# EAGLE board GrapherBlank4 (EAGLE 5.10), part 1 of 2
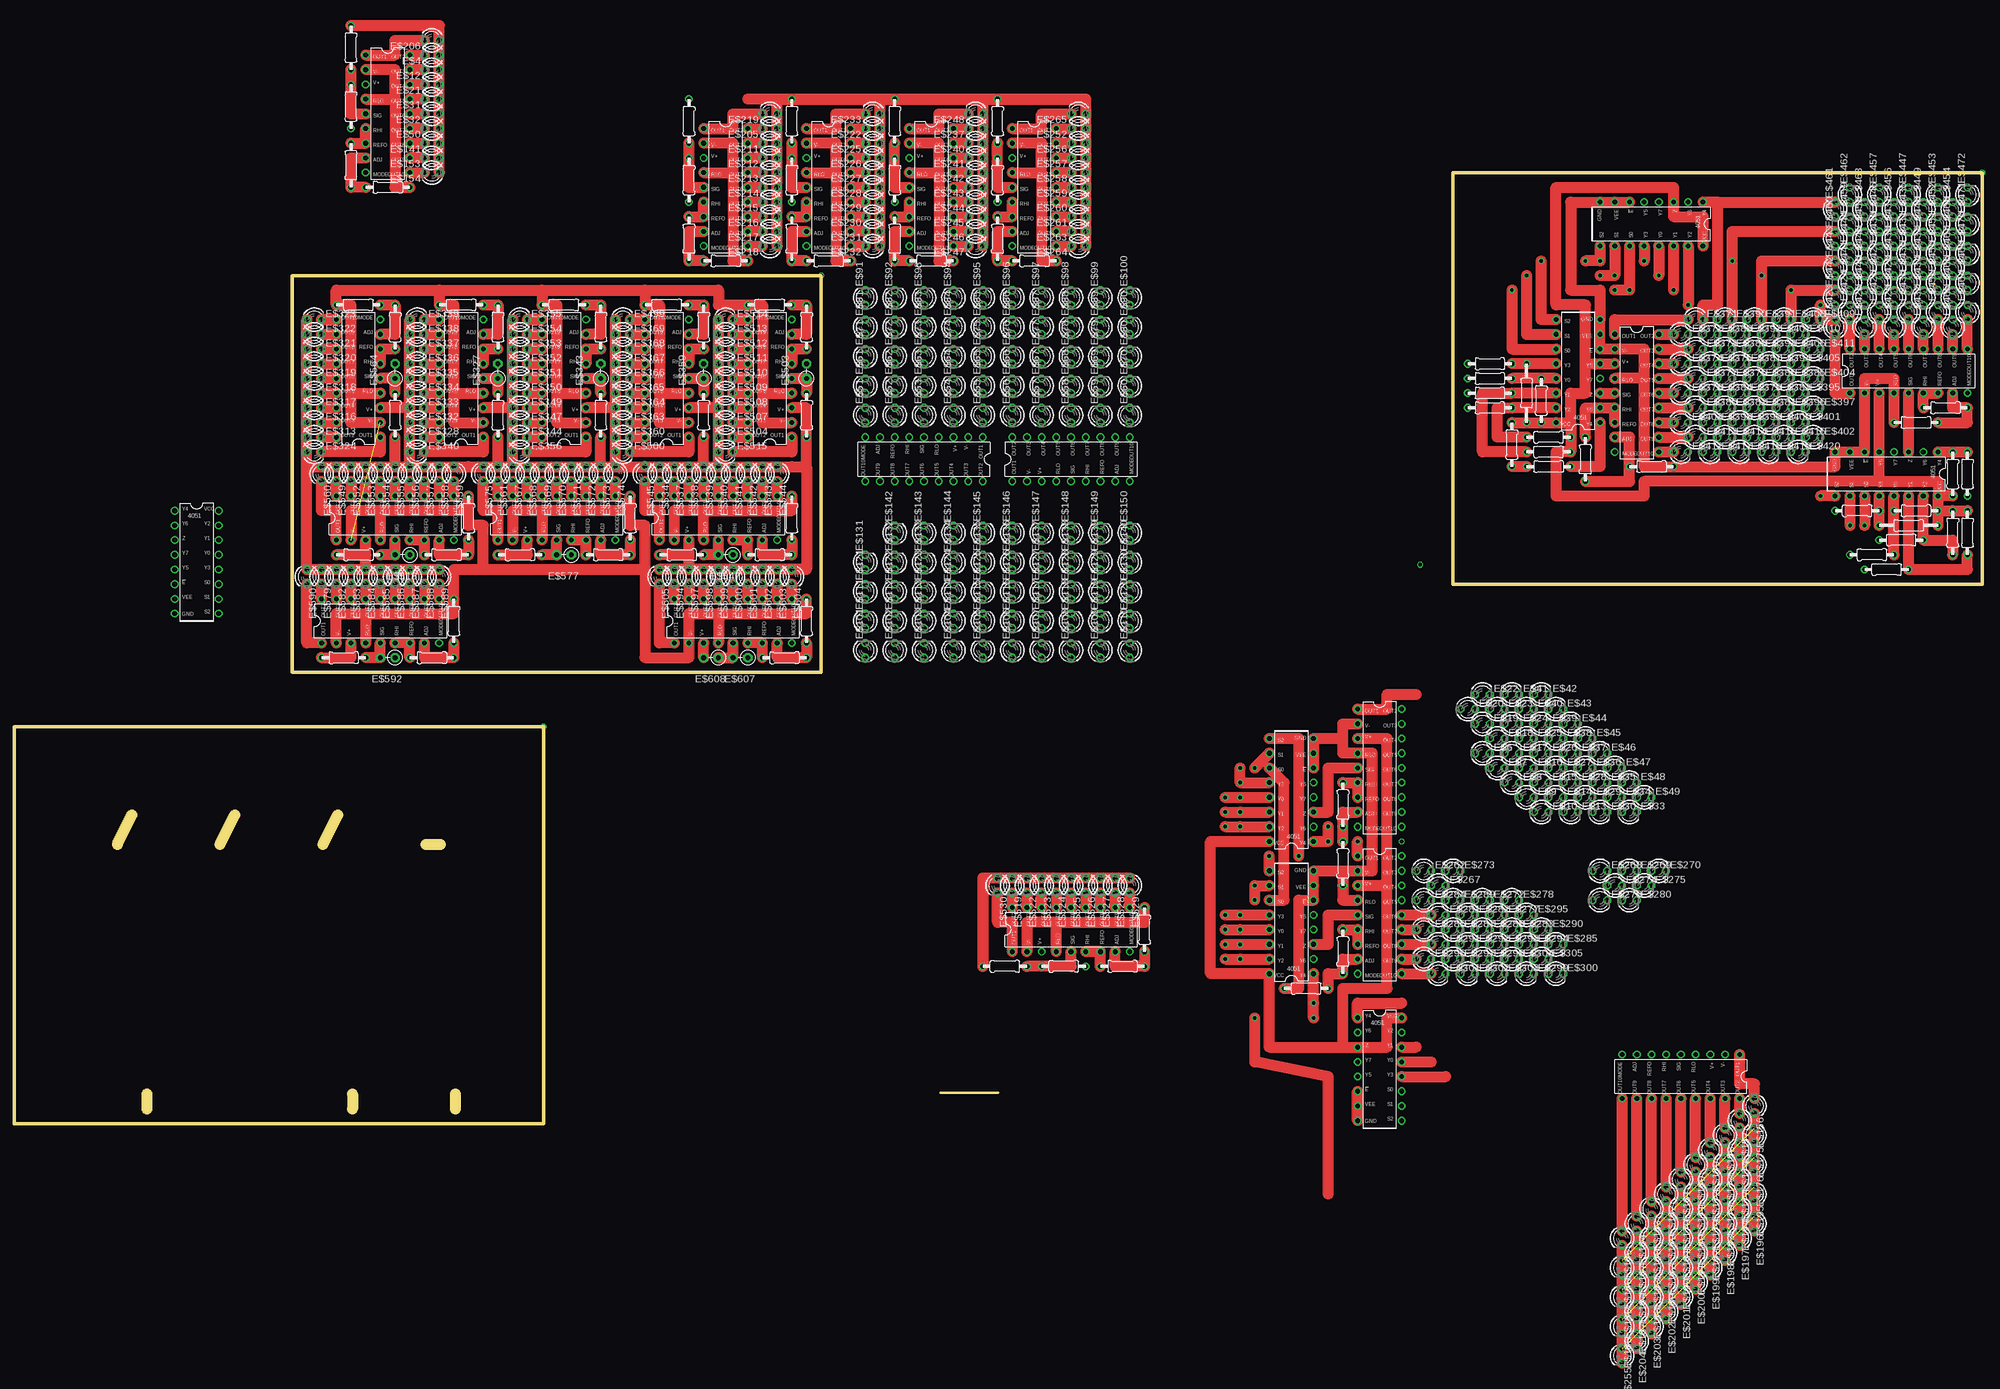
[diagram p0: board, top side]
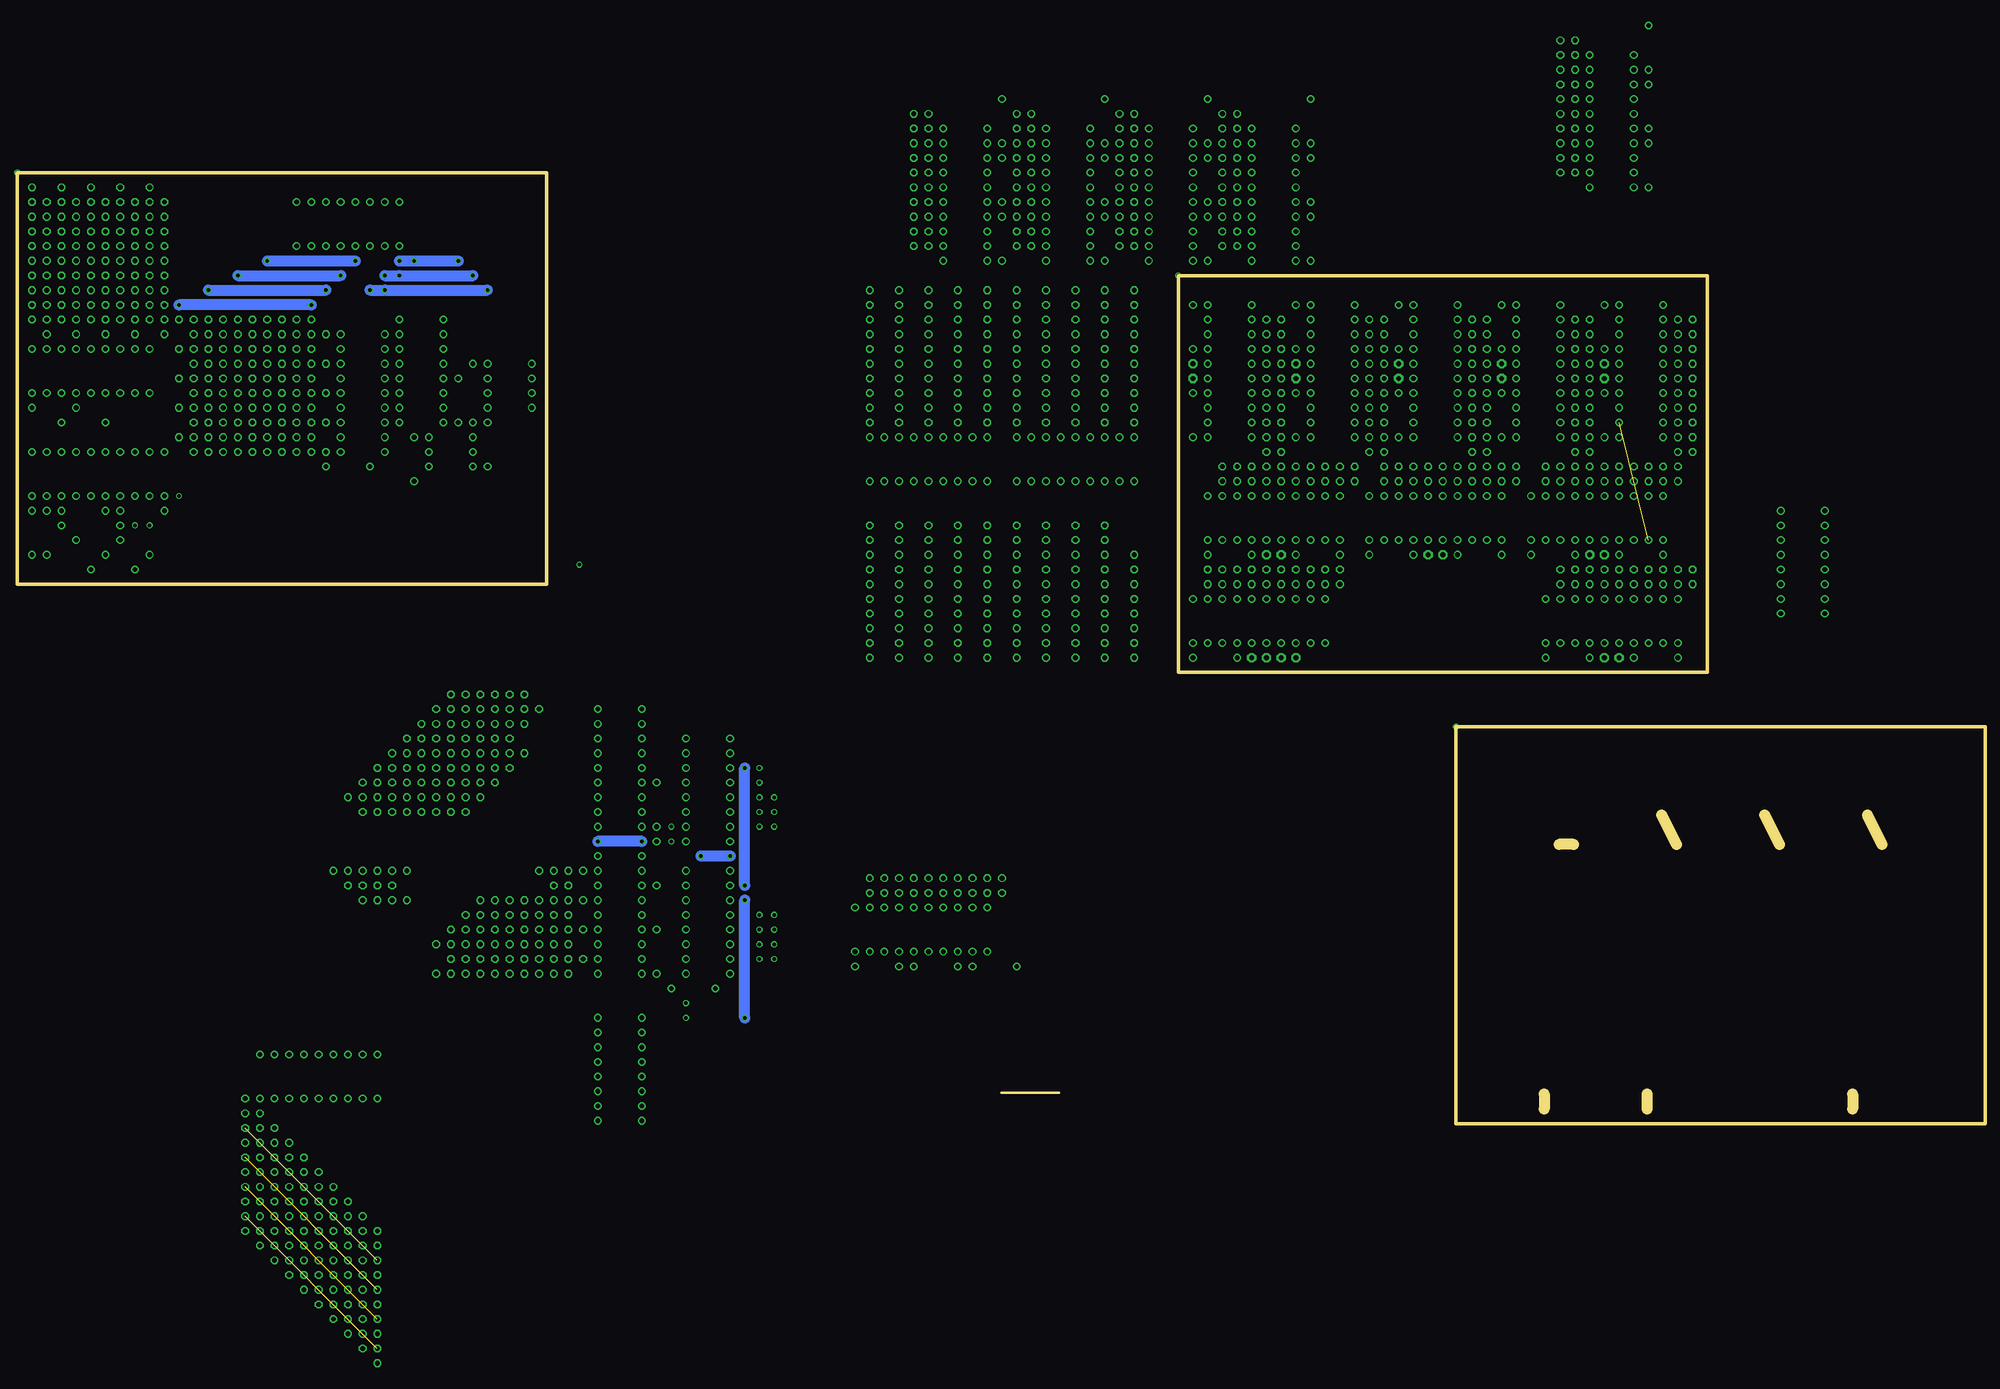
[diagram p1: board, bottom side, seen from below]

Size 340.11 x 164.34 mm. Coordinates in mm from the lower left corner, seen from the top.
Outline: 139.45,77.98 139.45,146.56 48.01,146.56 48.01,77.98 139.45,77.98
Outline: 340.11,93.22 340.11,164.34 248.67,164.34 248.67,93.22 340.11,93.22
Outline: 91.44,0 91.44,68.58 0,68.58 0,0 91.44,0
Copper layers (1*16): Top 0.035mm / dielectric 1.5mm / Bottom 0.035mm
Design rules "default": minimum track width 10mil, minimum drill 24mil, track to track 8mil, track to pad 8mil, pad to pad 8mil, via to via 8mil, smd to smd 8mil, copper to edge 40mil, drill to drill 8mil, minimum pad ring 10mil, minimum via ring 8mil, stop-mask expansion 4mil, vias tented up to drill 0mil, thermal gap 10mil
Milling: 8 lines

## Footprints (pad centres in the part's own frame; a part is rotated, then mirrored left to right if it is on the bottom)
LM3914-10LED-BARGRAPH = drill 0.813 round: 1!R -3.81,1.27; 1!S -3.81,3.81; 1Q 3.81,1.27; 2!R -3.81,-3.81; 2!S -3.81,-6.35; 2Q 3.81,-8.89; 2Q1 3.81,-11.43; 2Q3 -3.81,-11.43; 3!R 3.81,-1.27; 3!S 3.81,-3.81; 3Q 3.81,-6.35; 4!R 3.81,3.81; 4!S 3.81,6.35; 4Q -3.81,8.89; GND -3.81,-8.89; NC -3.81,6.35; OE -3.81,-1.27; VCC 3.81,8.89
RESISTOR = drill 0.813 round: IN1 -3.81,0; IN2 3.81,0
LED3MM = drill 0.813 octagon: A -1.27,0; K 1.27,0
4051-ANALOG-MUX = drill 0.813 round: CLOCK 3.81,-6.35; GND -3.81,-8.89; Q0 3.81,-8.89; Q1 -3.81,-6.35; Q2 -3.81,-3.81; Q3 -3.81,-1.27; Q4 -3.81,3.81; Q5 -3.81,6.35; Q6 -3.81,1.27; Q7 3.81,1.27; Q8 3.81,-1.27; Q9 3.81,3.81; Q10 3.81,6.35; Q11 -3.81,8.89; RESET 3.81,-3.81; VCC 3.81,8.89
RS-2,5 = drill 0.813 pad 1.6 octagon: 1 -1.27,0; 2 1.27,0
RESISTOR-L2 = drill 0.813 round: IN1 -5.08,0; IN2 5.08,0

## Placement (x,y rotation side)
E$1  [LM3914-10LED-BARGRAPH]  235.97,62.74 0 top
E$2  [RESISTOR]  116.59,163.07 270 top
E$3  [RESISTOR]  122.94,149.1 180 top
E$4  [LED3MM]  72.14,184.66 180 top  (outside the outline)
E$5  [LM3914-10LED-BARGRAPH]  64.52,175.77 0 top
E$6  [LED3MM]  253.75,64.01 0 top
E$7  [LED3MM]  256.29,61.47 0 top
E$8  [LED3MM]  258.83,58.93 0 top
E$9  [LED3MM]  261.37,56.39 0 top
E$10  [LED3MM]  263.91,53.85 0 top
E$11  [RESISTOR]  58.17,165.61 90 top
E$12  [LED3MM]  72.14,182.12 180 top  (outside the outline)
E$13  [LED3MM]  268.99,53.85 0 top
E$14  [LED3MM]  266.45,56.39 0 top
E$15  [LED3MM]  263.91,58.93 0 top
E$16  [LED3MM]  261.37,61.47 0 top
E$17  [LED3MM]  258.83,64.01 0 top
E$18  [LED3MM]  256.29,66.55 0 top
E$19  [LED3MM]  253.75,69.09 0 top
E$20  [LED3MM]  251.21,71.63 0 top
E$21  [LED3MM]  72.14,179.58 180 top  (outside the outline)
E$22  [LED3MM]  253.75,74.17 0 top
E$23  [LED3MM]  256.29,71.63 0 top
E$24  [LED3MM]  258.83,69.09 0 top
E$25  [LED3MM]  261.37,66.55 0 top
E$26  [LED3MM]  263.91,64.01 0 top
E$27  [LED3MM]  266.45,61.47 0 top
E$28  [LED3MM]  268.99,58.93 0 top
E$29  [LED3MM]  271.53,56.39 0 top
E$30  [LED3MM]  274.07,53.85 0 top
E$31  [LED3MM]  72.14,177.04 180 top  (outside the outline)
E$32  [LED3MM]  72.14,174.5 180 top  (outside the outline)
E$33  [LED3MM]  279.15,53.85 0 top
E$34  [LED3MM]  276.61,56.39 0 top
E$35  [LED3MM]  274.07,58.93 0 top
E$36  [LED3MM]  271.53,61.47 0 top
E$37  [LED3MM]  268.99,64.01 0 top
E$38  [LED3MM]  266.45,66.55 0 top
E$39  [LED3MM]  263.91,69.09 0 top
E$40  [LED3MM]  261.37,71.63 0 top
E$41  [LED3MM]  258.83,74.17 0 top
E$42  [LED3MM]  263.91,74.17 0 top
E$43  [LED3MM]  266.45,71.63 0 top
E$44  [LED3MM]  268.99,69.09 0 top
E$45  [LED3MM]  271.53,66.55 0 top
E$46  [LED3MM]  274.07,64.01 0 top
E$47  [LED3MM]  276.61,61.47 0 top
E$48  [LED3MM]  279.15,58.93 0 top
E$49  [LED3MM]  281.69,56.39 0 top
E$50  [LED3MM]  72.14,171.96 180 top  (outside the outline)
E$51  [LED3MM]  147.07,122.43 90 top
E$52  [LED3MM]  152.15,122.43 90 top
E$53  [LED3MM]  157.23,122.43 90 top
E$54  [LED3MM]  162.31,122.43 90 top
E$55  [LED3MM]  167.39,122.43 90 top
E$56  [LED3MM]  172.47,122.43 90 top
E$57  [LED3MM]  177.55,122.43 90 top
E$58  [LED3MM]  182.63,122.43 90 top
E$59  [LED3MM]  187.71,122.43 90 top
E$60  [LED3MM]  192.79,122.43 90 top
E$61  [LED3MM]  147.07,127.51 90 top
E$62  [LED3MM]  152.15,127.51 90 top
E$63  [LED3MM]  157.23,127.51 90 top
E$64  [LED3MM]  162.31,127.51 90 top
E$65  [LED3MM]  167.39,127.51 90 top
E$66  [LED3MM]  172.47,127.51 90 top
E$67  [LED3MM]  177.55,127.51 90 top
E$68  [LED3MM]  182.63,127.51 90 top
E$69  [LED3MM]  187.71,127.51 90 top
E$70  [LED3MM]  192.79,127.51 90 top
E$71  [LED3MM]  147.07,132.59 90 top
E$72  [LED3MM]  152.15,132.59 90 top
E$73  [LED3MM]  157.23,132.59 90 top
E$74  [LED3MM]  162.31,132.59 90 top
E$75  [LED3MM]  167.39,132.59 90 top
E$76  [LED3MM]  172.47,132.59 90 top
E$77  [LED3MM]  177.55,132.59 90 top
E$78  [LED3MM]  182.63,132.59 90 top
E$79  [LED3MM]  187.71,132.59 90 top
E$80  [LED3MM]  192.79,132.59 90 top
E$81  [LED3MM]  147.07,137.67 90 top
E$82  [LED3MM]  152.15,137.67 90 top
E$83  [LED3MM]  157.23,137.67 90 top
E$84  [LED3MM]  162.31,137.67 90 top
E$85  [LED3MM]  167.39,137.67 90 top
E$86  [LED3MM]  172.47,137.67 90 top
E$87  [LED3MM]  177.55,137.67 90 top
E$88  [LED3MM]  182.63,137.67 90 top
E$89  [LED3MM]  187.71,137.67 90 top
E$90  [LED3MM]  192.79,137.67 90 top
E$91  [LED3MM]  147.07,142.75 90 top
E$92  [LED3MM]  152.15,142.75 90 top
E$93  [LED3MM]  157.23,142.75 90 top
E$94  [LED3MM]  162.31,142.75 90 top
E$95  [LED3MM]  167.39,142.75 90 top
E$96  [LED3MM]  172.47,142.75 90 top
E$97  [LED3MM]  177.55,142.75 90 top
E$98  [LED3MM]  182.63,142.75 90 top
E$99  [LED3MM]  187.71,142.75 90 top
E$100  [LED3MM]  192.79,142.75 90 top
E$101  [LED3MM]  147.07,81.79 90 top
E$102  [LED3MM]  152.15,81.79 90 top
E$103  [LED3MM]  157.23,81.79 90 top
E$104  [LED3MM]  162.31,81.79 90 top
E$105  [LED3MM]  167.39,81.79 90 top
E$106  [LED3MM]  172.47,81.79 90 top
E$107  [LED3MM]  177.55,81.79 90 top
E$108  [LED3MM]  182.63,81.79 90 top
E$109  [LED3MM]  187.71,81.79 90 top
E$110  [LED3MM]  192.79,81.79 90 top
E$111  [LED3MM]  147.07,86.87 90 top
E$112  [LED3MM]  152.15,86.87 90 top
E$113  [LED3MM]  157.23,86.87 90 top
E$114  [LED3MM]  162.31,86.87 90 top
E$115  [LED3MM]  167.39,86.87 90 top
E$116  [LED3MM]  172.47,86.87 90 top
E$117  [LED3MM]  177.55,86.87 90 top
E$118  [LED3MM]  182.63,86.87 90 top
E$119  [LED3MM]  187.71,86.87 90 top
E$120  [LED3MM]  192.79,86.87 90 top
E$121  [LED3MM]  147.07,91.95 90 top
E$122  [LED3MM]  152.15,91.95 90 top
E$123  [LED3MM]  157.23,91.95 90 top
E$124  [LED3MM]  162.31,91.95 90 top
E$125  [LED3MM]  167.39,91.95 90 top
E$126  [LED3MM]  172.47,91.95 90 top
E$127  [LED3MM]  177.55,91.95 90 top
E$128  [LED3MM]  182.63,91.95 90 top
E$129  [LED3MM]  187.71,91.95 90 top
E$130  [LED3MM]  192.79,91.95 90 top
E$131  [LED3MM]  147.07,97.03 90 top
E$132  [LED3MM]  152.15,97.03 90 top
E$133  [LED3MM]  157.23,97.03 90 top
E$134  [LED3MM]  162.31,97.03 90 top
E$135  [LED3MM]  167.39,97.03 90 top
E$136  [LED3MM]  172.47,97.03 90 top
E$137  [LED3MM]  177.55,97.03 90 top
E$138  [LED3MM]  182.63,97.03 90 top
E$139  [LED3MM]  187.71,97.03 90 top
E$140  [LED3MM]  192.79,97.03 90 top
E$141  [LED3MM]  72.14,169.42 180 top  (outside the outline)
E$142  [LED3MM]  152.15,102.11 90 top
E$143  [LED3MM]  157.23,102.11 90 top
E$144  [LED3MM]  162.31,102.11 90 top
E$145  [LED3MM]  167.39,102.11 90 top
E$146  [LED3MM]  172.47,102.11 90 top
E$147  [LED3MM]  177.55,102.11 90 top
E$148  [LED3MM]  182.63,102.11 90 top
E$149  [LED3MM]  187.71,102.11 90 top
E$150  [LED3MM]  192.79,102.11 90 top
E$151  [LM3914-10LED-BARGRAPH]  181.36,114.81 90 top
E$152  [LM3914-10LED-BARGRAPH]  158.5,114.81 270 top
E$153  [LED3MM]  72.14,166.88 180 top
E$154  [LED3MM]  72.14,164.34 180 top
E$155  [LM3914-10LED-BARGRAPH]  289.31,8.13 270 top
E$156  [LED3MM]  300.74,3.05 270 top
E$157  [LED3MM]  298.2,0.51 270 top
E$158  [LED3MM]  295.66,-2.03 270 top
E$159  [LED3MM]  293.12,-4.57 270 top  (outside the outline)
E$160  [LED3MM]  290.58,-7.11 270 top  (outside the outline)
E$161  [LED3MM]  288.04,-9.65 270 top  (outside the outline)
E$162  [LED3MM]  285.5,-12.19 270 top  (outside the outline)
E$163  [LED3MM]  282.96,-14.73 270 top  (outside the outline)
E$164  [LED3MM]  280.42,-17.27 270 top  (outside the outline)
E$165  [LED3MM]  277.88,-19.81 270 top  (outside the outline)
E$166  [LED3MM]  277.88,-24.89 270 top  (outside the outline)
E$167  [LED3MM]  280.42,-22.35 270 top  (outside the outline)
E$168  [LED3MM]  282.96,-19.81 270 top  (outside the outline)
E$169  [LED3MM]  285.5,-17.27 270 top  (outside the outline)
E$170  [LED3MM]  288.04,-14.73 270 top  (outside the outline)
E$171  [LED3MM]  290.58,-12.19 270 top  (outside the outline)
E$172  [LED3MM]  293.12,-9.65 270 top  (outside the outline)
E$173  [LED3MM]  295.66,-7.11 270 top  (outside the outline)
E$174  [LED3MM]  298.2,-4.57 270 top  (outside the outline)
E$175  [LED3MM]  300.74,-2.03 270 top
E$176  [LED3MM]  300.74,-7.11 270 top  (outside the outline)
E$177  [LED3MM]  298.2,-9.65 270 top  (outside the outline)
E$178  [LED3MM]  295.66,-12.19 270 top  (outside the outline)
E$179  [LED3MM]  293.12,-14.73 270 top  (outside the outline)
E$180  [LED3MM]  290.58,-17.27 270 top  (outside the outline)
E$181  [LED3MM]  288.04,-19.81 270 top  (outside the outline)
E$182  [LED3MM]  285.5,-22.35 270 top  (outside the outline)
E$183  [LED3MM]  282.96,-24.89 270 top  (outside the outline)
E$184  [LED3MM]  280.42,-27.43 270 top  (outside the outline)
E$185  [LED3MM]  277.88,-29.97 270 top  (outside the outline)
E$186  [LED3MM]  277.88,-35.05 270 top  (outside the outline)
E$187  [LED3MM]  280.42,-32.51 270 top  (outside the outline)
E$188  [LED3MM]  282.96,-29.97 270 top  (outside the outline)
E$189  [LED3MM]  285.5,-27.43 270 top  (outside the outline)
E$190  [LED3MM]  288.04,-24.89 270 top  (outside the outline)
E$191  [LED3MM]  290.58,-22.35 270 top  (outside the outline)
E$192  [LED3MM]  293.12,-19.81 270 top  (outside the outline)
E$193  [LED3MM]  295.66,-17.27 270 top  (outside the outline)
E$194  [LED3MM]  298.2,-14.73 270 top  (outside the outline)
E$195  [LED3MM]  300.74,-12.19 270 top  (outside the outline)
E$196  [LED3MM]  300.74,-17.27 270 top  (outside the outline)
E$197  [LED3MM]  298.2,-19.81 270 top  (outside the outline)
E$198  [LED3MM]  295.66,-22.35 270 top  (outside the outline)
E$199  [LED3MM]  293.12,-24.89 270 top  (outside the outline)
E$200  [LED3MM]  290.58,-27.43 270 top  (outside the outline)
E$201  [LED3MM]  288.04,-29.97 270 top  (outside the outline)
E$202  [LED3MM]  285.5,-32.51 270 top  (outside the outline)
E$203  [LED3MM]  282.96,-35.05 270 top  (outside the outline)
E$204  [LED3MM]  280.42,-37.59 270 top  (outside the outline)
E$205  [LED3MM]  130.56,171.96 180 top  (outside the outline)
E$206  [LED3MM]  72.14,187.2 180 top  (outside the outline)
E$207  [LM3914-10LED-BARGRAPH]  122.94,163.07 0 top
E$208  [RESISTOR]  116.59,152.91 90 top
E$209  [RESISTOR]  58.17,185.93 270 top  (outside the outline)
E$210  [RESISTOR]  116.59,173.23 270 top  (outside the outline)
E$211  [LED3MM]  130.56,169.42 180 top  (outside the outline)
E$212  [LED3MM]  130.56,166.88 180 top
E$213  [LED3MM]  130.56,164.34 180 top
E$214  [LED3MM]  130.56,161.8 180 top
E$215  [LED3MM]  130.56,159.26 180 top
E$216  [LED3MM]  130.56,156.72 180 top
E$217  [LED3MM]  130.56,154.18 180 top
E$218  [LED3MM]  130.56,151.64 180 top
E$219  [LED3MM]  130.56,174.5 180 top  (outside the outline)
E$220  [RESISTOR]  64.52,161.8 180 top
E$221  [RESISTOR]  58.17,175.77 270 top  (outside the outline)
E$222  [LED3MM]  148.34,171.96 180 top  (outside the outline)
E$223  [LM3914-10LED-BARGRAPH]  140.72,163.07 0 top
E$224  [RESISTOR]  134.37,152.91 90 top
E$225  [LED3MM]  148.34,169.42 180 top  (outside the outline)
E$226  [LED3MM]  148.34,166.88 180 top
E$227  [LED3MM]  148.34,164.34 180 top
E$228  [LED3MM]  148.34,161.8 180 top
E$229  [LED3MM]  148.34,159.26 180 top
E$230  [LED3MM]  148.34,156.72 180 top
E$231  [LED3MM]  148.34,154.18 180 top
E$232  [LED3MM]  148.34,151.64 180 top
E$233  [LED3MM]  148.34,174.5 180 top  (outside the outline)
E$234  [RESISTOR]  134.37,173.23 270 top  (outside the outline)
E$235  [RESISTOR]  140.72,149.1 180 top
E$236  [RESISTOR]  134.37,163.07 270 top
E$237  [LED3MM]  166.12,171.96 180 top  (outside the outline)
E$238  [LM3914-10LED-BARGRAPH]  158.5,163.07 0 top
E$239  [RESISTOR]  152.15,152.91 90 top
E$240  [LED3MM]  166.12,169.42 180 top  (outside the outline)
E$241  [LED3MM]  166.12,166.88 180 top
E$242  [LED3MM]  166.12,164.34 180 top
E$243  [LED3MM]  166.12,161.8 180 top
E$244  [LED3MM]  166.12,159.26 180 top
E$245  [LED3MM]  166.12,156.72 180 top
E$246  [LED3MM]  166.12,154.18 180 top
E$247  [LED3MM]  166.12,151.64 180 top
E$248  [LED3MM]  166.12,174.5 180 top  (outside the outline)
E$249  [RESISTOR]  152.15,173.23 270 top  (outside the outline)
E$250  [RESISTOR]  158.5,149.1 180 top
E$251  [RESISTOR]  152.15,163.07 270 top
E$252  [LED3MM]  183.9,171.96 180 top  (outside the outline)
E$253  [LM3914-10LED-BARGRAPH]  176.28,163.07 0 top
E$254  [RESISTOR]  169.93,152.91 90 top
E$255  [LED3MM]  277.88,-40.13 270 top  (outside the outline)
E$256  [LED3MM]  183.9,169.42 180 top  (outside the outline)
E$257  [LED3MM]  183.9,166.88 180 top
E$258  [LED3MM]  183.9,164.34 180 top
E$259  [LED3MM]  183.9,161.8 180 top
E$260  [LED3MM]  183.9,159.26 180 top
E$261  [LED3MM]  183.9,156.72 180 top
E$262  [LED3MM]  243.59,43.69 0 top
E$263  [LED3MM]  183.9,154.18 180 top
E$264  [LED3MM]  183.9,151.64 180 top
E$265  [LED3MM]  183.9,174.5 180 top  (outside the outline)
E$266  [RESISTOR]  169.93,173.23 270 top  (outside the outline)
E$267  [LED3MM]  246.13,41.15 0 top
E$268  [LED3MM]  274.07,43.69 0 top
E$269  [LED3MM]  279.15,43.69 0 top
E$270  [LED3MM]  284.23,43.69 0 top
E$271  [RESISTOR]  176.28,149.1 180 top
E$272  [LED3MM]  253.75,38.61 0 top
E$273  [LED3MM]  248.67,43.69 0 top
E$274  [LED3MM]  276.61,41.15 0 top
E$275  [LED3MM]  281.69,41.15 0 top
E$276  [RESISTOR]  169.93,163.07 270 top
E$277  [LED3MM]  256.29,36.07 0 top
E$278  [LED3MM]  258.83,38.61 0 top
E$279  [LED3MM]  274.07,38.61 0 top
E$280  [LED3MM]  279.15,38.61 0 top
E$281  [LED3MM]  246.13,36.07 0 top
E$282  [LED3MM]  251.21,36.07 0 top
E$283  [LED3MM]  258.83,33.53 0 top
E$284  [LED3MM]  243.59,38.61 0 top
E$285  [LED3MM]  266.45,30.99 0 top
E$286  [LED3MM]  243.59,33.53 0 top
E$287  [LED3MM]  248.67,33.53 0 top
E$288  [LED3MM]  253.75,33.53 0 top
E$289  [LED3MM]  248.67,38.61 0 top
E$290  [LED3MM]  263.91,33.53 0 top
E$291  [LED3MM]  246.13,30.99 0 top
E$292  [LED3MM]  251.21,30.99 0 top
E$293  [LED3MM]  256.29,30.99 0 top
E$294  [LED3MM]  261.37,30.99 0 top
E$295  [LED3MM]  261.37,36.07 0 top
E$296  [LED3MM]  243.59,28.45 0 top
E$297  [LED3MM]  248.67,28.45 0 top
E$298  [LED3MM]  253.75,28.45 0 top
E$299  [LED3MM]  261.37,25.91 0 top
E$300  [LED3MM]  266.45,25.91 0 top
E$301  [LED3MM]  246.13,25.91 0 top
E$302  [LED3MM]  251.21,25.91 0 top
E$303  [LED3MM]  256.29,25.91 0 top
E$304  [LED3MM]  258.83,28.45 0 top
E$305  [LED3MM]  263.91,28.45 0 top
E$306  [LM3914-10LED-BARGRAPH]  235.97,37.34 0 top
E$307  [4051-ANALOG-MUX]  220.73,34.8 180 top
E$308  [RESISTOR]  229.62,29.72 90 top
E$309  [RESISTOR]  223.27,23.37 0 top
E$310  [RESISTOR]  229.62,55.12 90 top
E$311  [RESISTOR]  229.62,44.96 90 top
E$312  [4051-ANALOG-MUX]  220.73,57.66 180 top
E$313  [LED3MM]  51.82,118.62 0 top
E$314  [LM3914-10LED-BARGRAPH]  59.44,127.51 180 top
E$315  [RESISTOR]  65.79,137.67 270 top
E$316  [LED3MM]  51.82,121.16 0 top
E$317  [LED3MM]  51.82,123.7 0 top
E$318  [LED3MM]  51.82,126.24 0 top
E$319  [LED3MM]  51.82,128.78 0 top
E$320  [LED3MM]  51.82,131.32 0 top
E$321  [LED3MM]  51.82,133.86 0 top
E$322  [LED3MM]  51.82,136.4 0 top
E$323  [LED3MM]  51.82,138.94 0 top
E$324  [LED3MM]  51.82,116.08 0 top
E$325  [RESISTOR]  65.79,122.43 270 top
E$326  [RESISTOR]  59.44,141.48 0 top
E$327  [RS-2,5]  83.57,130.05 90 top
E$328  [LED3MM]  69.6,118.62 0 top
E$329  [4051-ANALOG-MUX]  235.97,9.4 0 top
E$330  [LM3914-10LED-BARGRAPH]  77.22,127.51 180 top
E$331  [RESISTOR]  83.57,137.67 270 top
E$332  [LED3MM]  69.6,121.16 0 top
E$333  [LED3MM]  69.6,123.7 0 top
E$334  [LED3MM]  69.6,126.24 0 top
E$335  [LED3MM]  69.6,128.78 0 top
E$336  [LED3MM]  69.6,131.32 0 top
E$337  [LED3MM]  69.6,133.86 0 top
E$338  [LED3MM]  69.6,136.4 0 top
E$339  [LED3MM]  69.6,138.94 0 top
E$340  [LED3MM]  69.6,116.08 0 top
E$341  [RESISTOR]  101.35,122.43 270 top
E$342  [RESISTOR]  77.22,141.48 0 top
E$343  [RS-2,5]  101.35,130.05 90 top
E$344  [LED3MM]  87.38,118.62 0 top
E$345  [LM3914-10LED-BARGRAPH]  95,127.51 180 top
E$346  [RESISTOR]  101.35,137.67 270 top
E$347  [LED3MM]  87.38,121.16 0 top
E$348  [4051-ANALOG-MUX]  31.5,97.03 0 top
E$349  [LED3MM]  87.38,123.7 0 top
E$350  [LED3MM]  87.38,126.24 0 top
E$351  [LED3MM]  87.38,128.78 0 top
E$352  [LED3MM]  87.38,131.32 0 top
E$353  [LED3MM]  87.38,133.86 0 top
E$354  [LED3MM]  87.38,136.4 0 top
E$355  [LED3MM]  87.38,138.94 0 top
E$356  [LED3MM]  87.38,116.08 0 top
E$357  [RESISTOR]  119.13,122.43 270 top
E$358  [RESISTOR]  95,141.48 0 top
E$359  [RS-2,5]  119.13,130.05 90 top
E$360  [LED3MM]  105.16,118.62 0 top
E$361  [LM3914-10LED-BARGRAPH]  112.78,127.51 180 top
E$362  [RESISTOR]  119.13,137.67 270 top
E$363  [LED3MM]  105.16,121.16 0 top
E$364  [LED3MM]  105.16,123.7 0 top
E$365  [LED3MM]  105.16,126.24 0 top
E$366  [LED3MM]  105.16,128.78 0 top
E$367  [LED3MM]  105.16,131.32 0 top
E$368  [LED3MM]  105.16,133.86 0 top
E$369  [LED3MM]  105.16,136.4 0 top
E$370  [LM3914-10LED-BARGRAPH]  280.42,127.51 0 top
E$371  [LED3MM]  290.58,138.94 0 top
E$372  [LED3MM]  288.04,136.4 0 top
E$373  [LED3MM]  290.58,133.86 0 top
E$374  [LED3MM]  288.04,131.32 0 top
E$375  [LED3MM]  293.12,131.32 0 top
E$376  [LED3MM]  295.66,128.78 0 top
E$377  [LED3MM]  290.58,128.78 0 top
E$378  [LED3MM]  288.04,126.24 0 top
E$379  [LED3MM]  298.2,126.24 0 top
E$380  [LED3MM]  290.58,123.7 0 top
E$381  [LED3MM]  300.74,123.7 0 top
E$382  [LED3MM]  295.66,123.7 0 top
E$383  [LED3MM]  303.28,126.24 0 top
E$384  [LED3MM]  293.12,126.24 0 top
E$385  [LED3MM]  305.82,128.78 0 top
E$386  [LED3MM]  300.74,128.78 0 top
E$387  [LED3MM]  298.2,131.32 0 top
E$388  [LED3MM]  295.66,133.86 0 top
E$389  [LED3MM]  293.12,136.4 0 top
E$390  [LED3MM]  295.66,138.94 0 top
E$391  [LED3MM]  300.74,138.94 0 top
E$392  [LED3MM]  298.2,136.4 0 top
E$393  [LED3MM]  300.74,133.86 0 top
E$394  [LED3MM]  303.28,131.32 0 top
E$395  [LED3MM]  308.36,126.24 0 top
E$396  [LED3MM]  305.82,123.7 0 top
E$397  [LED3MM]  310.9,123.7 0 top
E$398  [LED3MM]  293.12,121.16 0 top
E$399  [LED3MM]  298.2,121.16 0 top
E$400  [LED3MM]  303.28,121.16 0 top
E$401  [LED3MM]  308.36,121.16 0 top
E$402  [LED3MM]  310.9,118.62 0 top
E$403  [LED3MM]  288.04,121.16 0 top
E$404  [LED3MM]  310.9,128.78 0 top
E$405  [LED3MM]  308.36,131.32 0 top
E$406  [LED3MM]  305.82,133.86 0 top
E$407  [LED3MM]  303.28,136.4 0 top
E$408  [LED3MM]  305.82,138.94 0 top
E$409  [LED3MM]  310.9,138.94 0 top
E$410  [LED3MM]  308.36,136.4 0 top
E$411  [LED3MM]  310.9,133.86 0 top
E$412  [LED3MM]  288.04,116.08 0 top
E$413  [LED3MM]  290.58,118.62 0 top
E$414  [LED3MM]  295.66,118.62 0 top
E$415  [LED3MM]  300.74,118.62 0 top
E$416  [LED3MM]  305.82,118.62 0 top
E$417  [LED3MM]  293.12,116.08 0 top
E$418  [LED3MM]  298.2,116.08 0 top
E$419  [LED3MM]  303.28,116.08 0 top
E$420  [LED3MM]  308.36,116.08 0 top
E$421  [4051-ANALOG-MUX]  270.26,130.05 180 top
E$422  [LM3914-10LED-BARGRAPH]  326.14,130.05 90 top
E$423  [LED3MM]  314.71,137.67 90 top
E$424  [LED3MM]  317.25,140.21 90 top
E$425  [LED3MM]  319.79,137.67 90 top
E$426  [LED3MM]  322.33,140.21 90 top
E$427  [LED3MM]  322.33,145.29 90 top
E$428  [LED3MM]  324.87,142.75 90 top
E$429  [LED3MM]  324.87,137.67 90 top
E$430  [LED3MM]  327.41,140.21 90 top
E$431  [LED3MM]  327.41,150.37 90 top
E$432  [LED3MM]  329.95,137.67 90 top
E$433  [LED3MM]  329.95,147.83 90 top
E$434  [LED3MM]  329.95,142.75 90 top
E$435  [LED3MM]  327.41,155.45 90 top
E$436  [LED3MM]  327.41,145.29 90 top
E$437  [LED3MM]  324.87,152.91 90 top
E$438  [LED3MM]  324.87,147.83 90 top
E$439  [LED3MM]  322.33,150.37 90 top
E$440  [LED3MM]  319.79,142.75 90 top
E$441  [LED3MM]  317.25,145.29 90 top
E$442  [LED3MM]  314.71,142.75 90 top
E$443  [LED3MM]  314.71,147.83 90 top
E$444  [LED3MM]  317.25,150.37 90 top
E$445  [LED3MM]  319.79,147.83 90 top
E$446  [LED3MM]  322.33,155.45 90 top
E$447  [LED3MM]  327.41,160.53 90 top
E$448  [LED3MM]  329.95,152.91 90 top
E$449  [LED3MM]  329.95,157.99 90 top
E$450  [LED3MM]  332.49,145.29 90 top
E$451  [LED3MM]  332.49,150.37 90 top
E$452  [LED3MM]  332.49,155.45 90 top
E$453  [LED3MM]  332.49,160.53 90 top
E$454  [LED3MM]  335.03,157.99 90 top
E$455  [LED3MM]  332.49,140.21 90 top
E$456  [LED3MM]  324.87,157.99 90 top
E$457  [LED3MM]  322.33,160.53 90 top
E$458  [LED3MM]  319.79,152.91 90 top
E$459  [LED3MM]  317.25,155.45 90 top
E$460  [LED3MM]  314.71,152.91 90 top
E$461  [LED3MM]  314.71,157.99 90 top
E$462  [LED3MM]  317.25,160.53 90 top
E$463  [LED3MM]  319.79,157.99 90 top
E$464  [LED3MM]  337.57,140.21 90 top
E$465  [LED3MM]  335.03,137.67 90 top
E$466  [LED3MM]  335.03,142.75 90 top
E$467  [LED3MM]  335.03,147.83 90 top
E$468  [LED3MM]  335.03,152.91 90 top
E$469  [LED3MM]  337.57,145.29 90 top
E$470  [LED3MM]  337.57,150.37 90 top
E$471  [LED3MM]  337.57,155.45 90 top
E$472  [LED3MM]  337.57,160.53 90 top
E$473  [RESISTOR]  333.76,123.7 180 top
E$474  [RESISTOR]  328.68,121.16 180 top
E$475  [4051-ANALOG-MUX]  323.6,112.27 270 top
E$476  [RESISTOR]  271.53,114.81 90 top
E$477  [RESISTOR]  282.96,113.54 180 top
E$478  [RESISTOR]  255.02,123.7 180 top
E$479  [RESISTOR]  255.02,126.24 180 top
E$480  [RESISTOR]  255.02,128.78 180 top
E$481  [RESISTOR]  255.02,131.32 180 top
E$482  [RESISTOR]  265.18,113.54 180 top
E$483  [RESISTOR]  263.91,124.97 270 top
E$484  [RESISTOR]  265.18,118.62 0 top
E$485  [RESISTOR]  265.18,116.08 0 top
E$486  [RESISTOR-L2]  261.37,126.24 90 top
E$487  [RESISTOR]  258.83,117.35 270 top
E$488  [RESISTOR]  321.06,98.3 0 top
E$489  [RESISTOR]  323.6,95.76 0 top
E$490  [RESISTOR]  326.14,100.84 0 top
E$491  [RESISTOR]  318.52,105.92 0 top
E$492  [RESISTOR-L2]  327.41,103.38 180 top
E$493  [RESISTOR]  328.68,105.92 180 top
E$494  [RESISTOR]  335.03,102.11 270 top
E$495  [RESISTOR]  337.57,102.11 270 top
E$496  [4051-ANALOG-MUX]  282.96,155.45 270 top
E$497  [RESISTOR]  335.03,112.27 270 top
E$498  [RESISTOR]  337.57,112.27 270 top
E$499  [LED3MM]  105.16,138.94 0 top
E$500  [LED3MM]  105.16,116.08 0 top
E$501  [RESISTOR]  136.91,122.43 270 top
E$502  [RESISTOR]  112.78,141.48 0 top
E$503  [RS-2,5]  136.91,130.05 90 top
E$504  [LED3MM]  122.94,118.62 0 top
E$505  [LM3914-10LED-BARGRAPH]  130.56,127.51 180 top
E$506  [RESISTOR]  136.91,137.67 270 top
E$507  [LED3MM]  122.94,121.16 0 top
E$508  [LED3MM]  122.94,123.7 0 top
E$509  [LED3MM]  122.94,126.24 0 top
E$510  [LED3MM]  122.94,128.78 0 top
E$511  [LED3MM]  122.94,131.32 0 top
E$512  [LED3MM]  122.94,133.86 0 top
E$513  [LED3MM]  122.94,136.4 0 top
E$514  [LED3MM]  122.94,138.94 0 top
E$515  [LED3MM]  122.94,116.08 0 top
E$516  [RESISTOR]  83.57,122.43 270 top
E$517  [RESISTOR]  130.56,141.48 0 top
E$518  [RS-2,5]  67.06,98.3 180 top
E$519  [LED3MM]  172.47,41.15 270 top
E$520  [LM3914-10LED-BARGRAPH]  181.36,33.53 90 top
E$521  [RESISTOR]  191.52,27.18 180 top
E$522  [LED3MM]  175.01,41.15 270 top
E$523  [LED3MM]  177.55,41.15 270 top
E$524  [LED3MM]  180.09,41.15 270 top
E$525  [LED3MM]  182.63,41.15 270 top
E$526  [LED3MM]  185.17,41.15 270 top
E$527  [LED3MM]  187.71,41.15 270 top
E$528  [LED3MM]  190.25,41.15 270 top
E$529  [LED3MM]  192.79,41.15 270 top
E$530  [LED3MM]  169.93,41.15 270 top
E$531  [RESISTOR]  171.2,27.18 0 top
E$532  [RESISTOR]  195.33,33.53 270 top
E$533  [RESISTOR]  181.36,27.18 0 top
E$534  [LED3MM]  111.51,112.27 270 top
E$535  [LM3914-10LED-BARGRAPH]  120.4,104.65 90 top
E$536  [RESISTOR]  130.56,98.3 180 top
E$537  [LED3MM]  114.05,112.27 270 top
E$538  [LED3MM]  116.59,112.27 270 top
E$539  [LED3MM]  119.13,112.27 270 top
E$540  [LED3MM]  121.67,112.27 270 top
E$541  [LED3MM]  124.21,112.27 270 top
E$542  [LED3MM]  126.75,112.27 270 top
E$543  [LED3MM]  129.29,112.27 270 top
E$544  [LED3MM]  131.83,112.27 270 top
E$545  [LED3MM]  108.97,112.27 270 top
E$546  [RESISTOR]  134.37,104.65 270 top
E$547  [RS-2,5]  122.94,98.3 180 top
E$548  [RESISTOR]  115.32,98.3 180 top
E$549  [LED3MM]  55.63,112.27 270 top
E$550  [LM3914-10LED-BARGRAPH]  64.52,104.65 90 top
E$551  [RESISTOR]  74.68,98.3 180 top
E$552  [LED3MM]  58.17,112.27 270 top
E$553  [LED3MM]  60.71,112.27 270 top
E$554  [LED3MM]  63.25,112.27 270 top
E$555  [LED3MM]  65.79,112.27 270 top
E$556  [LED3MM]  68.33,112.27 270 top
E$557  [LED3MM]  70.87,112.27 270 top
E$558  [LED3MM]  73.41,112.27 270 top
E$559  [LED3MM]  75.95,112.27 270 top
E$560  [LED3MM]  53.09,112.27 270 top
E$561  [LED3MM]  83.57,112.27 270 top
E$562  [RESISTOR]  78.49,104.65 270 top
E$563  [RESISTOR]  59.44,98.3 180 top
E$564  [RS-2,5]  65.79,130.05 90 top
E$565  [LM3914-10LED-BARGRAPH]  92.46,104.65 90 top
E$566  [RESISTOR]  102.62,98.3 180 top
E$567  [LED3MM]  86.11,112.27 270 top
E$568  [LED3MM]  88.65,112.27 270 top
E$569  [LED3MM]  91.19,112.27 270 top
E$570  [LED3MM]  93.73,112.27 270 top
E$571  [LED3MM]  96.27,112.27 270 top
E$572  [LED3MM]  98.81,112.27 270 top
E$573  [LED3MM]  101.35,112.27 270 top
E$574  [LED3MM]  103.89,112.27 270 top
E$575  [LED3MM]  81.03,112.27 270 top
E$576  [RESISTOR]  106.43,104.65 270 top
E$577  [RS-2,5]  95,98.3 180 top
E$578  [RESISTOR]  87.38,98.3 180 top
E$579  [LED3MM]  53.09,94.49 270 top
E$580  [LM3914-10LED-BARGRAPH]  61.98,86.87 90 top
E$581  [RESISTOR]  72.14,80.52 180 top
E$582  [LED3MM]  55.63,94.49 270 top
E$583  [LED3MM]  58.17,94.49 270 top
E$584  [LED3MM]  60.71,94.49 270 top
E$585  [LED3MM]  63.25,94.49 270 top
E$586  [LED3MM]  65.79,94.49 270 top
E$587  [LED3MM]  68.33,94.49 270 top
E$588  [LED3MM]  70.87,94.49 270 top
E$589  [LED3MM]  73.41,94.49 270 top
E$590  [LED3MM]  50.55,94.49 270 top
E$591  [RESISTOR]  75.95,86.87 270 top
E$592  [RS-2,5]  64.52,80.52 180 top
E$593  [RESISTOR]  56.9,80.52 180 top
E$594  [LED3MM]  114.05,94.49 270 top
E$595  [LM3914-10LED-BARGRAPH]  122.94,86.87 90 top
E$596  [RESISTOR]  133.1,80.52 180 top
E$597  [LED3MM]  116.59,94.49 270 top
E$598  [LED3MM]  119.13,94.49 270 top
E$599  [LED3MM]  121.67,94.49 270 top
E$600  [LED3MM]  124.21,94.49 270 top
E$601  [LED3MM]  126.75,94.49 270 top
E$602  [LED3MM]  129.29,94.49 270 top
E$603  [LED3MM]  131.83,94.49 270 top
E$604  [LED3MM]  134.37,94.49 270 top
E$605  [LED3MM]  111.51,94.49 270 top
E$606  [RESISTOR]  136.91,86.87 270 top
E$607  [RS-2,5]  125.48,80.52 180 top
E$608  [RS-2,5]  120.4,80.52 180 top

## Library data of the parts
E$1-E$3 E$5 E$11 E$151 E$152 E$155 E$207-E$210 E$220 E$221 E$223 E$224 E$234-E$236 E$238 E$239 E$249-E$251 E$253 E$254 E$266 E$271 E$276 E$306-E$312 E$314 E$315 E$325 E$326 E$329-E$331 E$341 E$342 E$345 E$346 E$348 E$357 E$358 E$361 E$362 E$370 E$421 E$422 E$473-E$498 E$501 E$502 E$505 E$506 E$516 E$517 E$520 E$521 E$531-E$533 E$535 E$536 E$546 E$548 E$550 E$551 E$562 E$563 E$565 E$566 E$576 E$578 E$580 E$581 E$591 E$593 E$595 E$596 E$606 = RussellLibrary
E$4 E$6-E$10 E$12-E$150 E$153 E$154 E$156-E$206 E$211-E$219 E$222 E$225-E$233 E$237 E$240-E$248 E$252 E$255-E$265 E$267-E$270 E$272-E$275 E$277-E$305 E$313 E$316-E$324 E$328 E$332-E$340 E$344 E$347 E$349-E$356 E$360 E$363-E$369 E$371-E$420 E$423-E$472 E$499 E$500 E$504 E$507-E$515 E$519 E$522-E$530 E$534 E$537-E$545 E$549 E$552-E$561 E$567-E$575 E$579 E$582-E$590 E$594 E$597-E$605 = led
E$327 E$343 E$359 E$503 E$518 E$547 E$564 E$577 E$592 E$607 E$608 = discrete

## Nets
GND: E$1.1!R E$1.NC E$306.1!R E$306.NC E$307.GND E$307.Q1 E$307.Q2 E$309.IN1 E$311.IN1 E$312.GND E$312.Q1 E$312.Q2
S$1: E$5.2Q1
S$2: E$5.3Q
S$3: E$5.3!R
S$4: E$5.4!R
S$5: E$5.VCC
S$6: E$5.4Q E$206.K
S$7: E$5.GND E$11.IN1 E$220.IN2
S$9: E$5.2!R E$5.2!S E$11.IN2
S$10: E$5.4!S E$12.K
S$11: E$207.2Q1
S$12: E$207.3Q
S$13: E$207.3!R
S$15: E$207.4!R
S$16: E$307.Q11
S$17: E$1.1!S E$306.1!S E$307.VCC E$312.VCC E$329.VCC
S$18: E$312.Q11
S$19: E$329.Q11
S$20: E$207.VCC
S$21: E$207.4Q E$219.K
S$22: E$306.OE E$307.Q4
S$23: E$306.2!R E$306.2!S E$308.IN2
S$24: E$306.GND E$308.IN1 E$309.IN2
S$26: E$3.IN1 E$207.1!R E$207.NC
S$27: E$3.IN2 E$207.GND E$208.IN1
S$28: E$1.2!R E$1.2!S E$310.IN2
S$29: E$207.2!R E$207.2!S E$208.IN2
S$30: E$207.OE E$210.IN2
S$31: E$5.1Q E$31.K
S$32: E$5.3!S E$50.K
S$33: E$5.2Q E$153.K
S$34: E$5.1!R E$5.NC E$220.IN1
S$35: E$5.OE E$209.IN2
S$37: E$1.GND E$310.IN1 E$311.IN2
S$38: E$1.OE E$312.Q4
S$39: E$307.Q0 E$312.Q0
S$40: E$154.A
S$41: E$1.4Q
S$42: E$223.2Q1
S$43: E$223.3Q
S$44: E$223.3!R
S$45: E$223.4!R
S$46: E$223.VCC
S$47: E$223.4Q E$233.K
S$48: E$223.GND E$224.IN1 E$235.IN2
S$49: E$223.2!R E$223.2!S E$224.IN2
S$50: E$223.4!S E$225.K
S$51: E$164.K E$167.K E$184.K E$187.K E$204.K
S$52: E$165.K E$255.K
S$53: E$163.K E$203.K
S$54: E$162.K E$202.K
S$55: E$161.K E$201.K
S$56: E$160.K E$200.K
S$57: E$159.K E$199.K
S$58: E$158.K E$198.K
S$59: E$157.K E$197.K
S$60: E$156.K E$196.K
S$61: E$196.A E$255.A
S$62: E$186.A E$195.A
S$63: E$176.A E$185.A
S$64: E$166.A E$175.A
S$65: E$155.VCC E$157.A
S$66: E$155.4Q E$156.A
S$67: E$155.4!S E$158.A
S$68: E$155.4!R E$159.A
S$69: E$155.1Q E$160.A
S$70: E$155.3!R E$161.A
S$71: E$155.2Q1 E$165.A
S$72: E$155.2Q E$164.A
S$73: E$155.3Q E$163.A
S$74: E$155.3!S E$162.A
S$75: E$223.1Q E$227.K
S$76: E$223.3!S E$229.K
S$77: E$223.2Q E$231.K
S$78: E$223.1!R E$223.NC E$235.IN1
S$79: E$223.OE E$234.IN2
S$80: E$232.A
S$81: E$238.2Q1
S$82: E$238.3Q
S$83: E$238.3!R
S$84: E$370.2Q1 E$412.A
S$85: E$262.A
S$86: E$370.2Q E$413.A
S$87: E$329.Q9
S$88: E$270.A
S$89: E$269.A
S$90: E$268.A
S$91: E$267.A
S$92: E$238.4!R
S$93: E$329.Q7
S$94: E$275.A
S$95: E$274.A
S$96: E$273.A
S$97: E$272.A
S$98: E$238.VCC
S$99: E$329.Q8
S$100: E$280.A
S$101: E$279.A
S$102: E$278.A
S$103: E$277.A
S$104: E$238.4Q E$248.K
S$105: E$238.GND E$239.IN1 E$250.IN2
S$106: E$285.A
S$107: E$284.A
S$108: E$283.A
S$109: E$282.A
S$110: E$281.A
S$111: E$307.RESET E$312.RESET
S$112: E$290.A
S$113: E$289.A
S$114: E$288.A
S$115: E$287.A
S$116: E$286.A
S$117: E$238.2!R E$238.2!S E$239.IN2
S$118: E$295.A
S$119: E$294.A
S$120: E$293.A
S$121: E$292.A
S$122: E$291.A
S$123: E$307.CLOCK E$312.CLOCK
S$124: E$300.A
S$125: E$299.A
S$126: E$298.A
S$127: E$297.A
S$128: E$296.A
S$129: E$312.Q8
S$130: E$305.A
S$131: E$304.A
S$132: E$303.A
S$133: E$302.A
S$134: E$301.A
S$135: E$306.4Q
S$136: E$238.4!S E$240.K
S$137: E$370.3Q E$403.A
S$138: E$312.Q7
S$139: E$312.Q9
S$140: E$312.Q10
S$141: E$307.Q10
S$142: E$307.Q9
S$143: E$307.Q7
S$144: E$307.Q8
S$145: E$370.3!S E$380.A
S$146: E$370.3!R E$378.A
S$147: E$370.1Q E$377.A
S$148: E$370.4!R E$374.A
S$149: E$370.4!S E$373.A
S$150: E$370.VCC E$372.A
S$151: E$370.4Q E$371.A
S$152: E$370.OE E$421.Q4
S$153: E$422.2Q1 E$464.A
S$154: E$422.2Q E$465.A
S$155: E$422.3Q E$455.A
S$156: E$422.3!S E$432.A
S$157: E$422.3!R E$430.A
S$158: E$329.GND E$329.Q1 E$329.Q2
S$159: E$422.1Q E$429.A
S$160: E$422.4!R E$426.A
S$161: E$422.4!S E$425.A
S$162: E$422.VCC E$424.A
S$163: E$422.4Q E$423.A
S$164: E$422.OE E$475.Q4
S$165: E$370.GND E$476.IN1 E$477.IN2
S$166: E$370.2!R E$370.2!S E$476.IN2
S$167: E$370.1!S E$421.VCC E$422.1!S E$475.VCC E$483.IN2 E$485.IN2 E$486.IN1 E$487.IN1 E$492.IN1 E$493.IN1 E$494.IN1 E$495.IN1 E$496.Q4 E$496.VCC E$497.IN2
S$168: E$421.Q11
S$169: E$421.Q10 E$478.IN1 E$484.IN1
S$170: E$421.Q7 E$480.IN1
S$171: E$421.Q8 E$481.IN1
S$172: E$421.Q9 E$479.IN1 E$485.IN1
S$173: E$482.IN2 E$487.IN2
S$174: E$408.K E$442.K E$496.Q9
S$175: E$391.K E$443.K E$496.Q7
S$176: E$390.K E$460.K E$496.Q8
S$177: E$475.Q8 E$491.IN2 E$492.IN2
S$178: E$475.Q7 E$488.IN2
S$179: E$475.Q9 E$489.IN2 E$495.IN2
S$180: E$475.Q10 E$490.IN2 E$494.IN2
S$181: E$371.K E$461.K E$496.Q11
S$182: E$409.K E$423.K E$496.Q10
S$183: E$370.1!R E$370.NC E$421.GND E$421.Q2 E$422.1!R E$422.NC E$474.IN2 E$475.GND E$475.Q2 E$477.IN1 E$496.GND E$496.Q1 E$496.Q2
S$184: E$421.Q0 E$496.Q0
S$185: E$421.CLOCK E$496.CLOCK
S$186: E$421.RESET E$496.RESET
S$187: E$422.2!R E$422.2!S E$473.IN2
S$188: E$422.GND E$473.IN1 E$474.IN1
S$189: E$475.Q11 E$498.IN1
S$190: E$475.Q0
S$191: E$475.CLOCK
S$192: E$475.RESET
S$193: E$238.1Q E$242.K
S$194: E$238.3!S E$244.K
S$195: E$238.2Q E$246.K
S$196: E$238.1!R E$238.NC E$250.IN1
S$197: E$218.A
S$198: E$238.OE E$249.IN2
S$199: E$247.A
S$200: E$253.2Q1
S$201: E$253.3Q
S$202: E$253.3!R
S$203: E$253.4!R
S$204: E$253.VCC
S$205: E$253.4Q E$265.K
S$206: E$253.GND E$254.IN1 E$271.IN2
S$207: E$253.2!R E$253.2!S E$254.IN2
S$208: E$253.4!S E$256.K
S$209: E$253.1Q E$258.K
S$210: E$253.3!S E$260.K
S$211: E$253.2Q E$263.K
S$212: E$253.1!R E$253.NC E$271.IN1
S$213: E$253.OE E$266.IN2
S$214: E$264.A
S$215: E$314.2Q1
S$216: E$314.3Q
S$217: E$314.3!R
S$218: E$314.4!R
S$219: E$314.VCC
S$220: E$314.4Q E$324.K
S$221: E$314.GND E$315.IN1 E$326.IN2
S$222: E$314.2!R E$314.2!S E$315.IN2
S$223: E$314.4!S E$316.K
S$224: E$314.1Q E$318.K
S$225: E$314.3!S E$320.K
S$226: E$314.2Q E$322.K
S$227: E$550.2Q1
S$228: E$314.OE
S$230: E$330.2Q1
S$231: E$330.3Q
S$232: E$330.3!R
S$233: E$330.4!R
S$234: E$330.VCC
S$235: E$330.4Q E$340.K
S$236: E$330.GND E$331.IN1 E$342.IN2
S$237: E$330.2!R E$330.2!S E$331.IN2
S$238: E$330.4!S E$332.K
S$239: E$330.1Q E$334.K
S$240: E$330.3!S E$336.K
S$241: E$330.2Q E$338.K
S$243: E$330.OE E$516.IN1
S$244: E$520.2Q1
S$245: E$345.2Q1
S$246: E$345.3Q
S$247: E$207.4!S E$211.K
S$248: E$207.1Q E$213.K
S$249: E$207.3!S E$215.K
S$250: E$207.2Q E$217.K
S$251: E$345.3!R
S$252: E$345.4!R
S$253: E$345.VCC
S$254: E$345.4Q E$356.K
S$255: E$345.GND E$346.IN1 E$358.IN2
S$256: E$345.2!R E$345.2!S E$346.IN2
S$257: E$345.4!S E$347.K
S$258: E$345.1Q E$350.K
S$259: E$345.3!S E$352.K
S$260: E$345.2Q E$354.K
S$261: E$520.3Q
S$262: E$341.IN1 E$345.OE
S$263: E$520.3!R
S$264: E$361.2Q1
S$265: E$361.3Q
S$266: E$361.3!R
S$267: E$361.4!R
S$268: E$361.VCC
S$269: E$361.4Q E$500.K
S$270: E$361.GND E$362.IN1 E$502.IN2
S$271: E$361.2!R E$361.2!S E$362.IN2
S$272: E$361.4!S E$363.K
S$273: E$361.1Q E$365.K
S$274: E$361.3!S E$367.K
S$275: E$361.2Q E$369.K
S$276: E$520.4!R
S$277: E$357.IN1 E$361.OE
S$278: E$520.VCC
S$279: E$505.2Q1
S$280: E$505.3Q
S$281: E$505.3!R
S$282: E$505.4!R
S$283: E$505.VCC
S$284: E$505.4Q E$515.K
S$285: E$505.GND E$506.IN1 E$517.IN2
S$286: E$505.2!R E$505.2!S E$506.IN2
S$287: E$505.4!S E$507.K
S$288: E$505.1Q E$509.K
S$289: E$505.3!S E$511.K
S$290: E$505.2Q E$513.K
S$291: E$314.1!S E$323.A E$330.1!S E$339.A E$341.IN2 E$345.1!S E$355.A E$357.IN2 E$361.1!S E$499.A E$501.IN2 E$505.1!S E$514.A E$516.IN2 E$535.1!S E$548.IN2 E$550.1!S E$563.IN2 E$589.A E$590.A E$604.A E$605.A
S$292: E$501.IN1 E$505.OE
S$293: E$520.4Q E$530.K
S$294: E$520.GND E$521.IN1 E$532.IN2
S$295: E$520.2!R E$520.2!S E$521.IN2
S$296: E$520.4!S E$522.K
S$297: E$520.1Q E$524.K
S$298: E$520.3!S E$526.K
S$299: E$520.2Q E$528.K
S$300: E$520.1!R E$520.NC E$532.IN1
S$301: E$520.OE E$531.IN2
S$302: E$529.A
S$303: E$535.2Q1
S$304: E$535.3Q
S$305: E$535.3!R
S$306: E$535.4!R
S$307: E$535.VCC
S$308: E$535.4Q E$545.K
S$309: E$535.GND E$536.IN1 E$546.IN2
S$310: E$535.2!R E$535.2!S E$536.IN2
S$311: E$535.4!S E$537.K
S$312: E$535.1Q E$539.K
S$313: E$535.3!S E$541.K
S$314: E$535.2Q E$543.K
S$315: E$535.1!R E$535.NC E$546.IN1
S$316: E$535.OE E$548.IN1
S$318: E$550.3Q
S$319: E$550.3!R
S$320: E$550.4!R
S$321: E$550.VCC
S$322: E$550.4Q E$560.K
S$323: E$550.GND E$551.IN1 E$562.IN2
S$324: E$550.2!R E$550.2!S E$551.IN2
S$325: E$550.4!S E$552.K
S$326: E$550.1Q E$554.K
S$327: E$550.3!S E$556.K
S$328: E$550.2Q E$558.K
S$330: E$550.OE E$563.IN1
S$333: E$565.2Q1
S$334: E$565.3Q
S$335: E$565.3!R
S$336: E$565.4!R
S$337: E$565.VCC
S$338: E$565.4Q E$575.K
S$339: E$565.GND E$566.IN1 E$576.IN2
S$340: E$565.2!R E$565.2!S E$566.IN2
S$341: E$565.4!S E$567.K
S$342: E$565.1Q E$569.K
S$343: E$565.3!S E$571.K
S$344: E$565.2Q E$573.K
S$346: E$565.OE E$578.IN1
S$347: E$565.1!S E$578.IN2
S$348: E$580.2Q1
S$349: E$580.3Q
S$350: E$580.3!R
S$351: E$580.4!R
S$352: E$580.VCC
S$353: E$580.4Q E$590.K
S$354: E$580.GND E$581.IN1 E$591.IN2
S$355: E$580.2!R E$580.2!S E$581.IN2
S$356: E$580.4!S E$582.K
S$357: E$580.1Q E$584.K
S$358: E$580.3!S E$586.K
S$359: E$580.2Q E$588.K
S$361: E$580.OE E$593.IN1
S$362: E$580.1!S E$593.IN2
S$363: E$595.2Q1
S$364: E$595.3Q
S$365: E$595.3!R
S$366: E$595.4!R
S$367: E$595.VCC
S$368: E$595.4Q E$605.K
S$370: E$595.GND E$596.IN1 E$606.IN2
S$371: E$595.2!R E$595.2!S E$596.IN2
S$372: E$595.4!S E$597.K
S$373: E$595.1Q E$599.K
S$374: E$595.3!S E$601.K
S$375: E$595.2Q E$603.K
S$376: E$314.1!R E$314.NC E$326.IN1 E$330.1!R E$330.NC E$342.IN1 E$345.1!R E$345.NC E$358.IN1 E$361.1!R E$361.NC E$502.IN1 E$505.1!R E$505.NC E$517.IN1 E$550.1!R E$550.NC E$562.IN1 E$565.1!R E$565.NC E$576.IN1 E$580.1!R E$580.NC E$591.IN1 E$595.1!R E$595.NC E$606.IN1
S$377: E$595.OE
S$378: E$595.1!S